# Altium PCB V1.PcbDoc
Units mil, origin at the board's own origin, x right, y up, seen from the top; angles counter-clockwise.
Board outline 1958.5 x 1958.5 mil, 2 copper layers (Top Layer, Bottom Layer); 18 components, 13 nets, 43 pads, 290 vias.
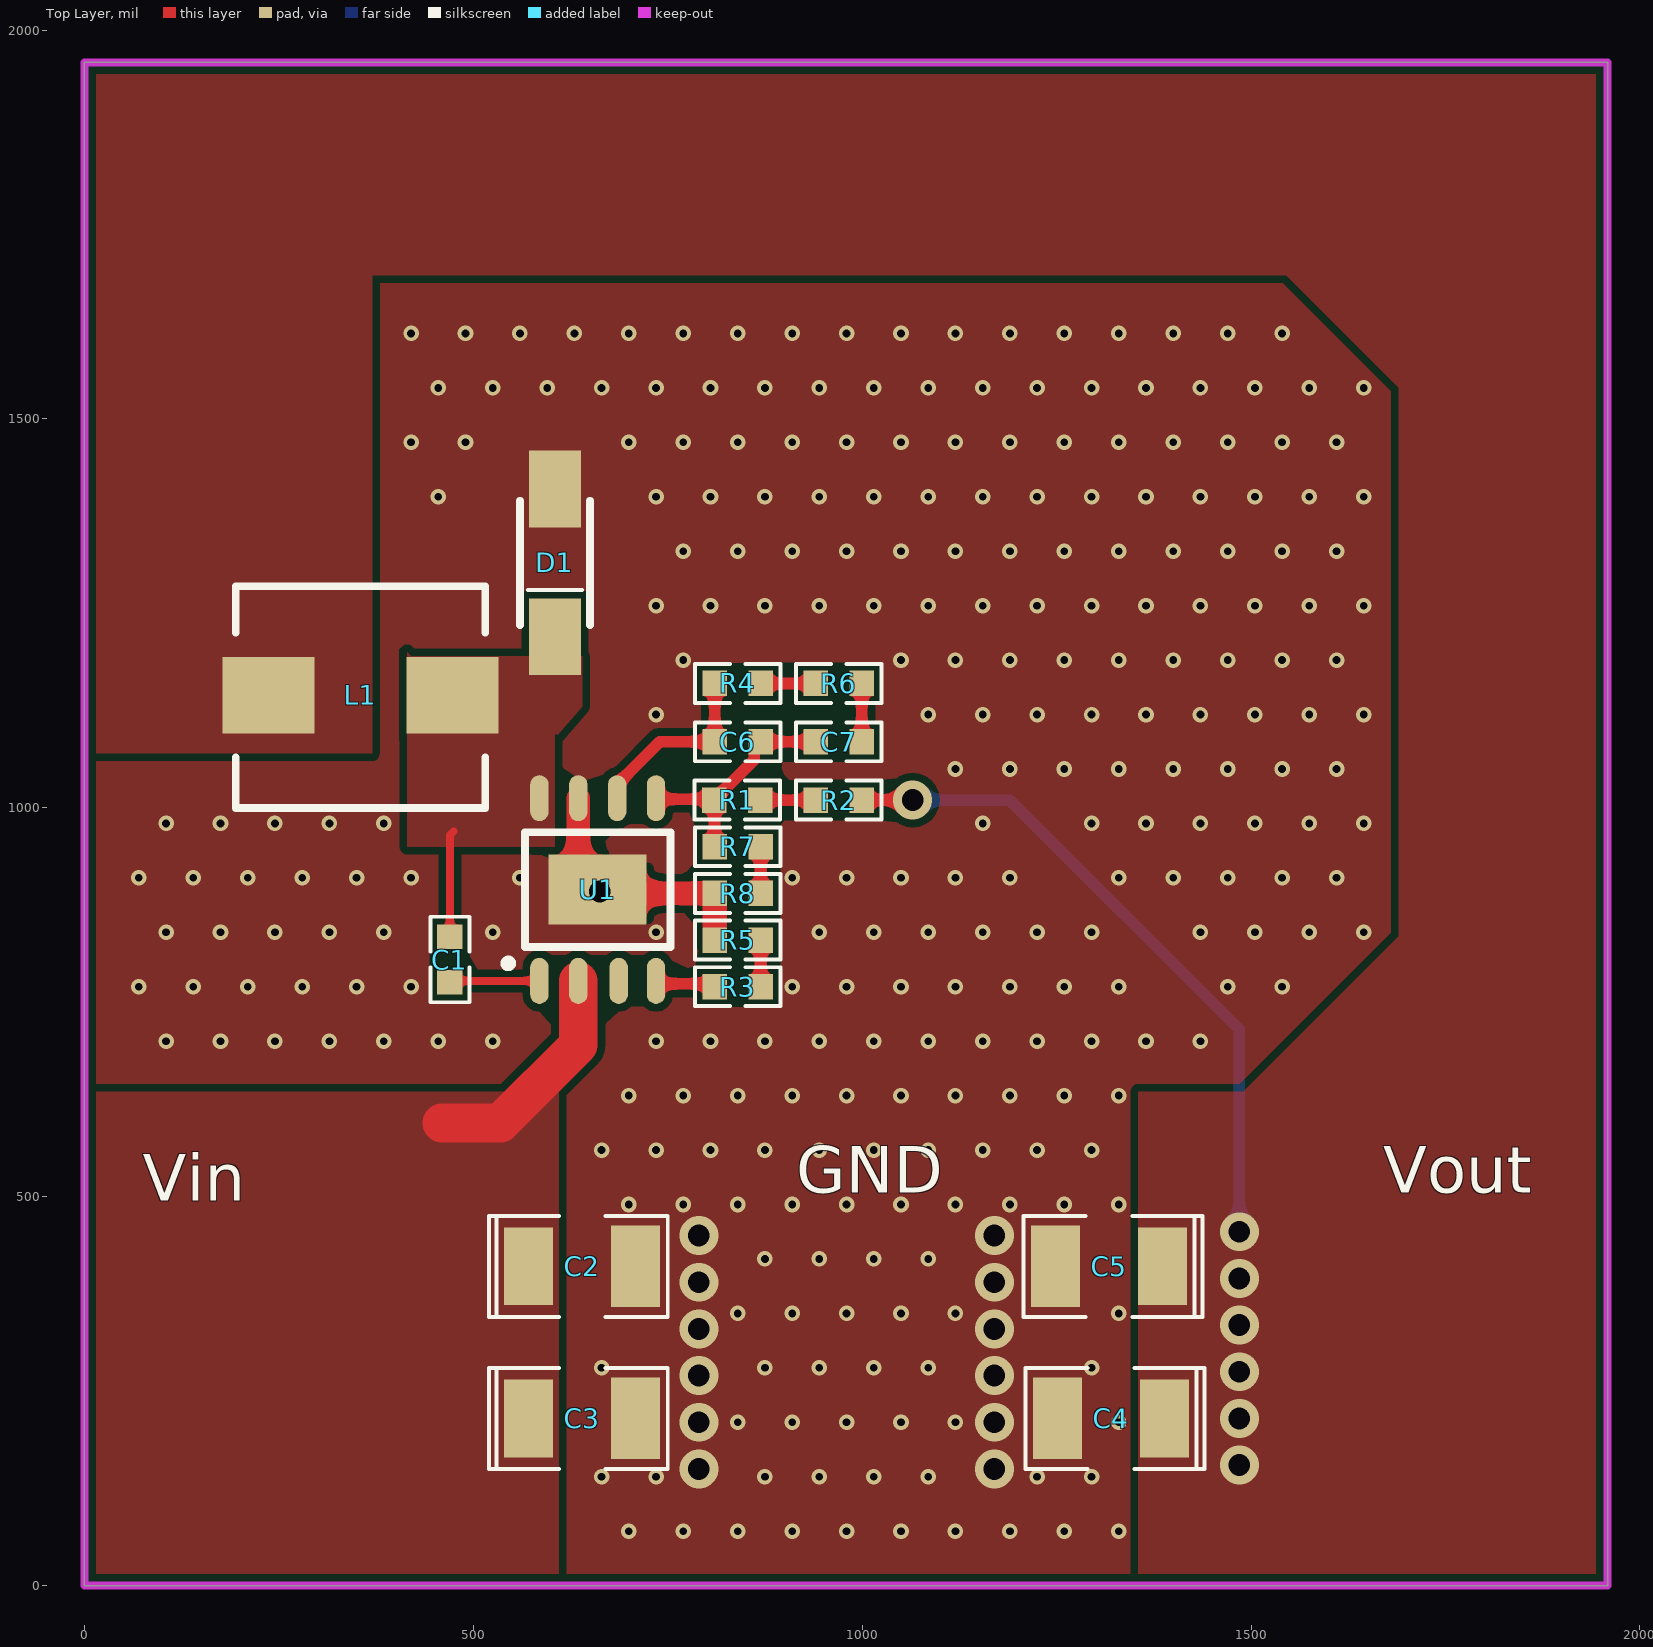
[diagram p0: Top Layer view]
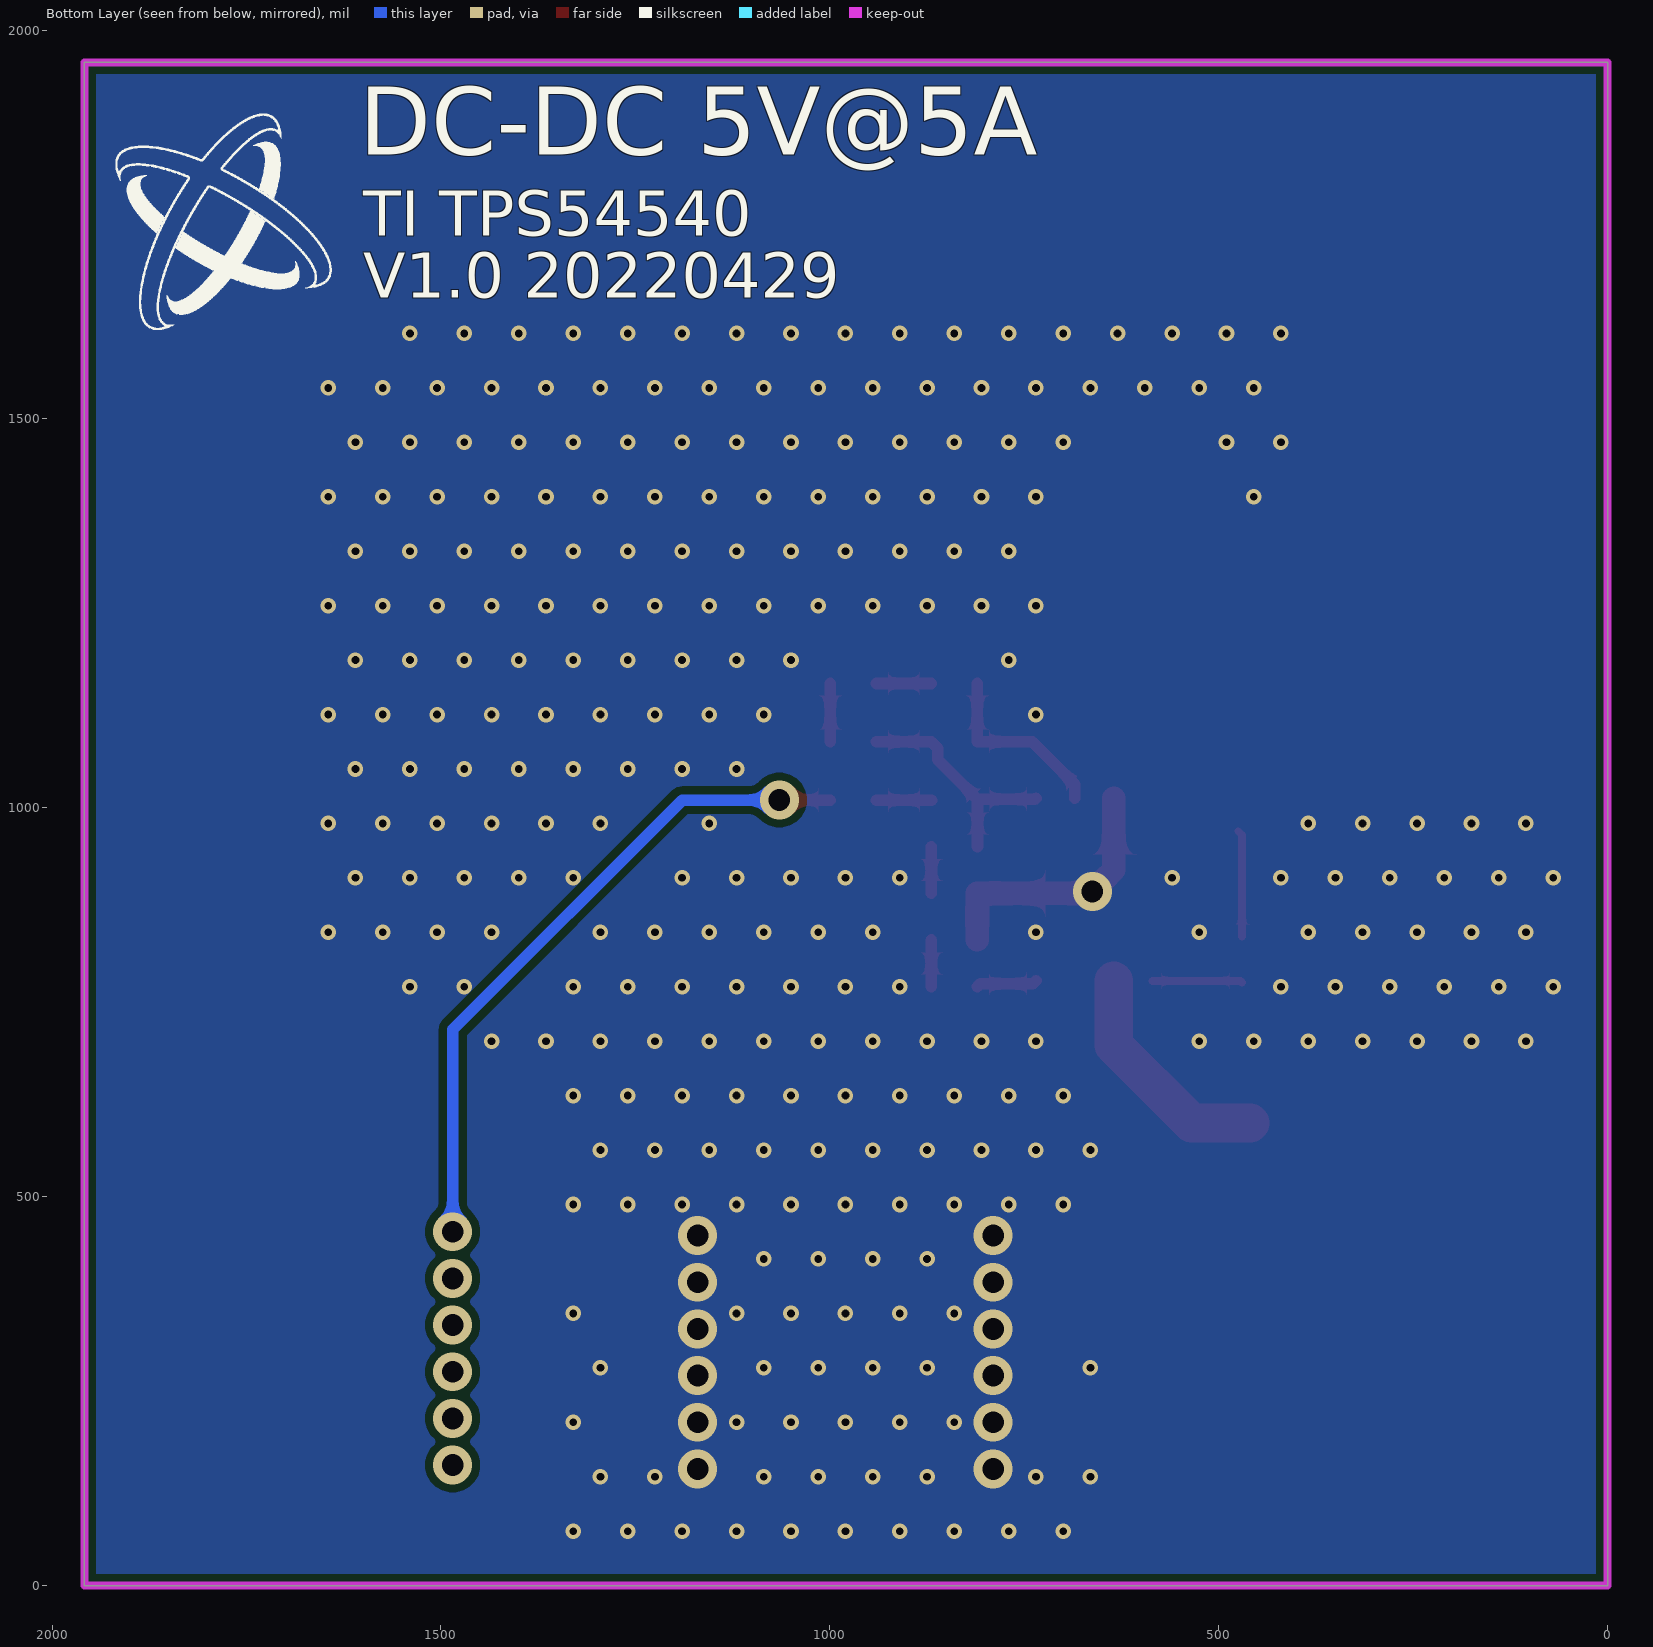
[diagram p1: Bottom Layer view, seen from below]
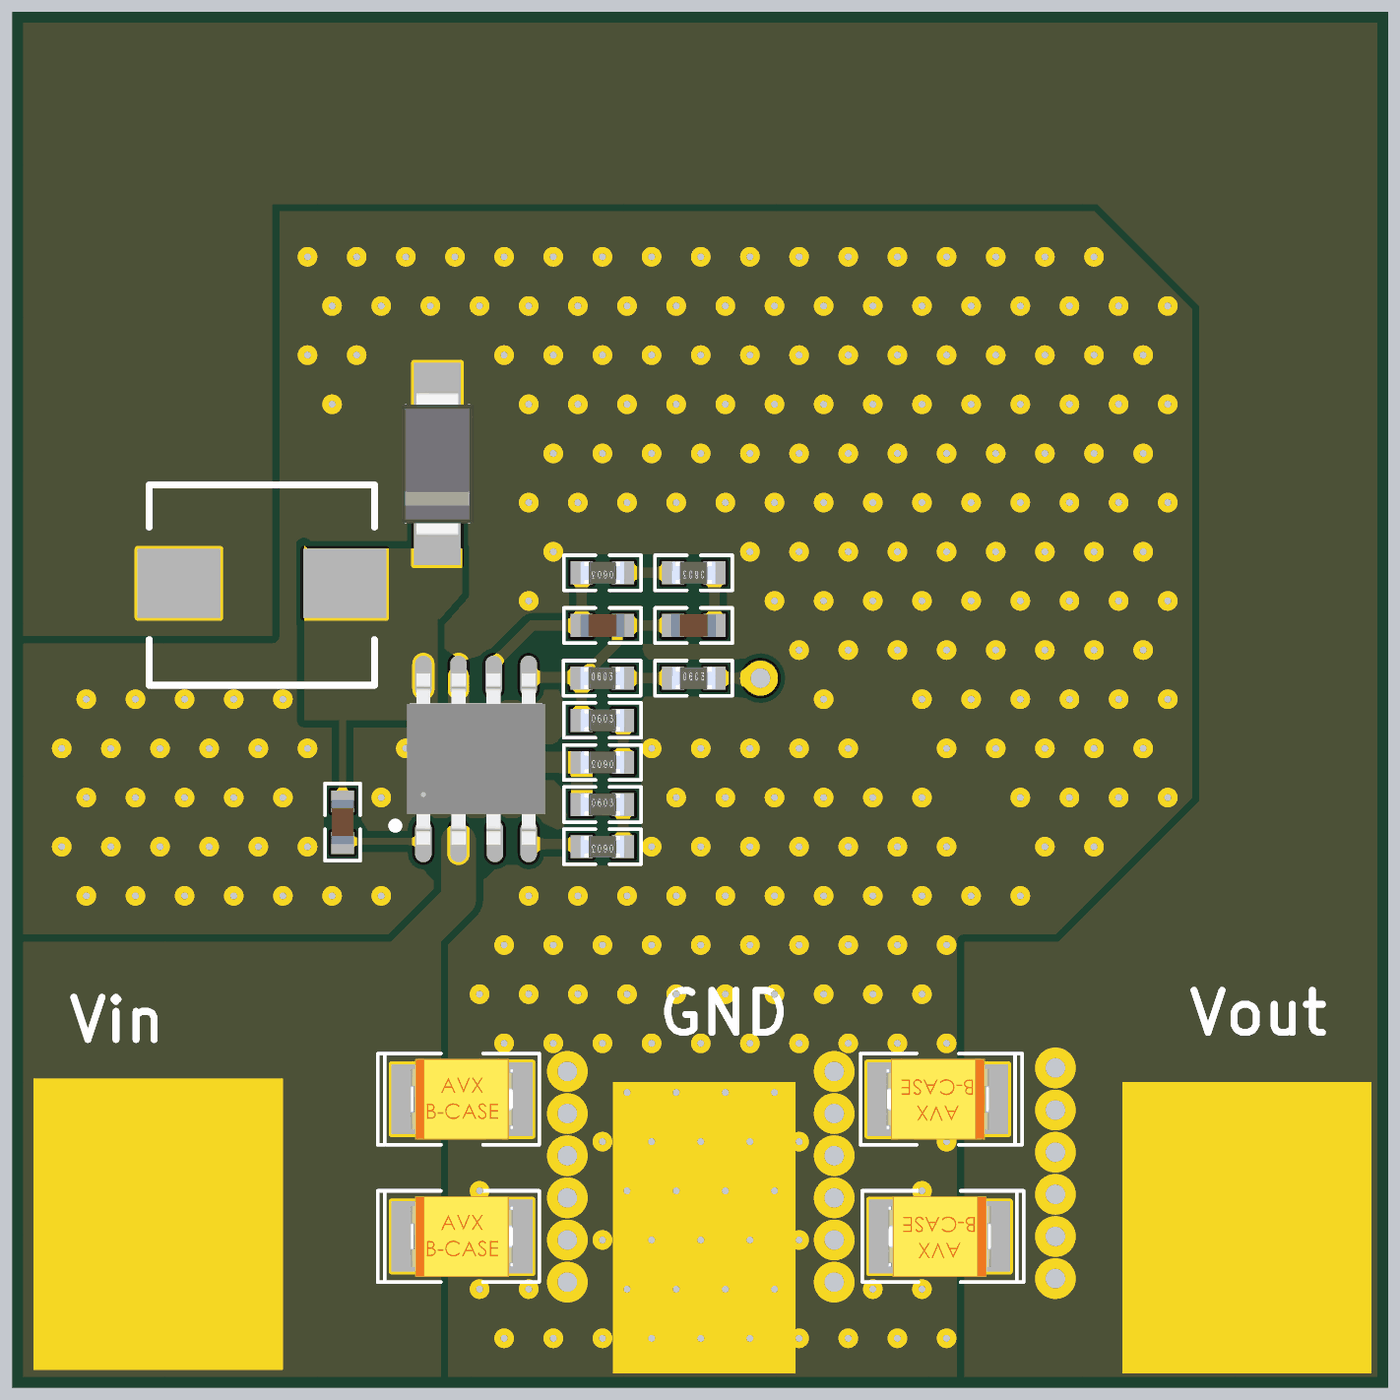
[diagram p2: 3D render of the assembled board from above, using the file's embedded part models]

## Layer stack, top to bottom
Top Solder: solder mask 0.4, Solder Resist, Dk 3.5
Top Layer: signal copper 1.4
Dielectric 1: dielectric 12.6, FR-4, Dk 4.8
Bottom Layer: signal copper 1.4
Bottom Solder: solder mask 0.4, Solder Resist, Dk 3.5

## Board outline
0,0 0,1958.5 1958.5,1958.5 1958.5,0

## Design rules (kind name [scope] priority, off if disabled: settings)
Clearance [All] p1: gap=10 ignorepadtopadclearanceinfootprint=FALSE except(0: Arc-Hole Track-Hole SMDPad-Hole THPad-Hole Via-Hole Fill-Hole Poly-Hole Region-Hole Text-Hole)
PolygonConnect [All] p1: connectstyle=Direct reliefconductorwidth=10 reliefentries=4 polygonreliefangle="90 Angle" airgapwidth=10
RoutingVias [All] p1: holewidth=10 width=20 viastyle="Through Hole" minholewidth=10 minwidth=20 maxholewidth=28 maxwidth=50
SolderMaskExpansion [All] p1: expansion=4 istentingtop=FALSE
Width [All] p1: maxlimit=50 minlimit=10 preferedwidth=10 minimp=50.000000 maximp=50.000000 favimp=50.000000
30 further rules are at their usual default settings.

## Components (designator, comment, footprint, x,y, rotation, side; value= is the part's Value field where it differs from the comment)
C1 "100nf" 0603C 470,805 r90 top
C2 "10uF" 3528B/1210 640,410.47 r0 top
C3 "10uF" 3528B/1210 640,215 r0 top
C4 "47u" 3528B/1210 1320,215 r180 top
C5 "47u" 3528B/1210 1317.5,410.47 r180 top
C6 "8p2" 0603C 840,1085 r0 top
C7 "1n8" 0603C 970,1085 r180 top
D1 "SS56" SMA 605,1315 r270 top
L1 "2u2" CD7X 355,1145 r180 top
R1 "60k" 0603R 839.53,1010 r0 top
R2 "0.4k" 0603R 970,1010 r0 top
R3 "76k" 0603R 840,770 r180 top
R4 "23k" 0603R 840,1160 r180 top
R5 "0.8k" 0603R 840,830 r0 top
R6 "0.7k" 0603R 970,1160 r180 top
R7 "11k" 0603R 840,950 r0 top
R8 "0.5k" 0603R 840,890 r180 top
U1 "TPS54540" SOP-8-PP 660,895 r90 top

## Footprints (in the part's own frame and the unit in brackets; to place one, negate y for a bottom-side part, rotate by r counter-clockwise, add the part's x,y. Pads: shape width x height; smd on the part's side, far side on the other; paste and mask are expansions set on the pad)
0603C [mm] "0603锟斤拷装锟斤拷锟斤拷锟斤拷锟斤拷"
  rect 0.8x0.83 smd: 1(-0.75,0) 2(0.75,0)
  silkscreen extent -1.4,-0.64 1.4,0.64, body extent -0.8,-0.41 0.8,0.41, height 0.81
0603R [mm] "0603锟斤拷装锟斤拷锟斤拷锟斤拷锟矫ｏ拷缺锟斤拷为锟斤拷锟斤拷锟斤拷锟斤拷/锟斤拷锟斤拷"
  rect 0.8x0.83 smd: 1(-0.75,0) 2(0.75,0)
  silkscreen extent -1.4,-0.64 1.4,0.64, body extent -0.8,-0.4 0.8,0.4, height 0.42
3528B/1210 [mm] "1210锟斤拷装锟斤拷锟斤拷锟斤拷锟紹锟斤拷锟矫ｏ拷缺锟斤拷为锟斤拷锟斤拷锟斤拷锟斤拷/锟斤拷锟斤拷"
  rect 1.6x2.54 smd: 1(-1.75,0)
  rect 1.6x2.667 smd: 2(1.75,0)
  silkscreen extent -3.05,-1.65 2.79,1.65, body extent -1.85,-1.47 1.85,1.46, height 2.03
CD7X [mm] "锟斤拷锟斤拷锟斤拷7mm*7mm锟斤拷械确锟阶皘ITEMGUID="
  rect 3x2.5 smd: 1(-3,0) 2(3,0)
  silkscreen extent -4.07,-3.56 4.07,3.68, body extent -4,-3.43 4,3.57, height 4
SMA [mm] "锟斤拷锟斤拷锟斤拷肖锟截伙拷锟斤拷锟斤拷锟杰的凤拷装锟斤拷锟斤拷锟斤拷锟竭碉拷一锟斤拷为锟斤拷锟斤拷"
  rect 2.5x1.7 smd: 1(-2.413,0) 2(2.413,0)
  silkscreen extent -2.03,-1.14 2.03,1.14, body extent -2.6,-1.3 2.6,1.3, height 2.37
SOP-8-PP [mm] "通锟斤拷SOP8锟斤拷装锟斤拷锟斤拷锟阶诧拷锟斤拷锟斤拷"
  oval 1.5x0.6 smd: 1(-2.984,1.905) 2(-2.984,0.635) 3(-2.984,-0.686) 4(-2.984,-1.905) 5(2.984,-1.905) 6(2.984,-0.635) 7(2.984,0.635) 8(2.984,1.905)
  rect 2.3x3.2 smd: 9(0,0)
  silkscreen extent -2.54,-2.37 1.87,3.05, body extent -3.1,-2.5 3.1,2.5, height 1.7

## Part data
C1 C6 C7: library part 电容_贴片
C2 C3 C4 C5: library part 电容_贴片钽
D1: library part 二极管_肖特基
L1: library part 电感_贴片
R1 R2 R3 R4 R5 R6 R7 R8: library part 电阻_贴片
U1: library part 芯片/IC-TPS54540

## Via types
v1: diameter 20, hole 10, Top Layer to Bottom Layer, 270 vias
v2: diameter 50, hole 28, Top Layer to Bottom Layer, 20 vias

## Nets (pads, with @x,y where several pads share a name; then routed paths per layer and width w, separated by ;. In a path a pad name is that pad's centre, name@x,y a point inside that pad or via, vN(x,y) a via of type N, cw(c..) or ccw(c..) an arc to the next point about the centre after c; other vN are vias at no path point)
GND: C2.2 C3.2 C4.2 C5.2 D1.1 R5.1 R8.2 U1.7 U1.9 | length 340.4
  Top Layer w30: U1.7 635,920 U1.9 665,890 R8.2 R5.1
  other v1: 700,70 770,70 840,70 910,70 980,70 1050,70 1120,70 1190,70 1260,70 1330,70 665,140 735,140 875,140 945,140 1015,140 1085,140 1225,140 1295,140 840,210 910,210 980,210 1050,210 1120,210 1330,210 665,280 875,280 945,280 1015,280 1085,280 1295,280 840,350 910,350 980,350 1050,350 1120,350 1330,350 875,420 945,420 1015,420 1085,420 700,490 770,490 840,490 910,490 980,490 1050,490 1120,490 1190,490 1260,490 1330,490 665,560 735,560 805,560 875,560 945,560 1015,560 1085,560 1155,560 1225,560 1295,560 700,630 770,630 840,630 910,630 980,630 1050,630 1120,630 1190,630 1260,630 1330,630 105,700 175,700 245,700 315,700 385,700 455,700 525,700 735,700 805,700 875,700 945,700 1015,700 1085,700 1155,700 1225,700 1295,700 1365,700 1435,700 70,770 140,770 210,770 280,770 350,770 420,770 910,770 980,770 1050,770 1120,770 1190,770 1260,770 1330,770 1470,770 1540,770 105,840 175,840 245,840 315,840 385,840 525,840 735,840 945,840 1015,840 1085,840 1155,840 1225,840 1295,840 1435,840 1505,840 1575,840 1645,840 70,910 140,910 210,910 280,910 350,910 420,910 560,910 910,910 980,910 1050,910 1120,910 1190,910 1330,910 1400,910 1470,910 1540,910 1610,910 105,980 175,980 245,980 315,980 385,980 1155,980 1295,980 1365,980 1435,980 1505,980 1575,980 1645,980 1120,1050 1190,1050 1260,1050 1330,1050 1400,1050 1470,1050 1540,1050 1610,1050 735,1120 1085,1120 1155,1120 1225,1120 1295,1120 1365,1120 1435,1120 1505,1120 1575,1120 1645,1120 770,1190 1050,1190 1120,1190 1190,1190 1260,1190 1330,1190 1400,1190 1470,1190 1540,1190 1610,1190 735,1260 805,1260 875,1260 945,1260 1015,1260 1085,1260 1155,1260 1225,1260 1295,1260 1365,1260 1435,1260 1505,1260 1575,1260 1645,1260 770,1330 840,1330 910,1330 980,1330 1050,1330 1120,1330 1190,1330 1260,1330 1330,1330 1400,1330 1470,1330 1540,1330 1610,1330 455,1400 735,1400 805,1400 875,1400 945,1400 1015,1400 1085,1400 1155,1400 1225,1400 1295,1400 1365,1400 1435,1400 1505,1400 1575,1400 1645,1400 420,1470 490,1470 700,1470 770,1470 840,1470 910,1470 980,1470 1050,1470 1120,1470 1190,1470 1260,1470 1330,1470 1400,1470 1470,1470 1540,1470 1610,1470 455,1540 525,1540 595,1540 665,1540 735,1540 805,1540 875,1540 945,1540 1015,1540 1085,1540 1155,1540 1225,1540 1295,1540 1365,1540 1435,1540 1505,1540 1575,1540 1645,1540 420,1610 490,1610 560,1610 630,1610 700,1610 770,1610 840,1610 910,1610 980,1610 1050,1610 1120,1610 1190,1610 1260,1610 1330,1610 1400,1610 1470,1610 1540,1610
  other v2: 790,150 1170,150 790,210 1170,210 790,270 1170,270 790,330 1170,330 790,390 1170,390 790,450 1170,450 662.5,892.5
NetC1_1: C1.1 U1.1 | length 115.8
  Top Layer w10: C1.1 472.03,777.5 U1.1
NetC1_2: C1.2 D1.2 L1.1 U1.8 | length 137.5
  Top Layer w10: C1.2 470,965 475,970
NetC6_1: C6.1 R4.2 U1.6 | length 240.9
  Top Layer w15: U1.6 685,1030.22 739.78,1085 C6.1 R4.2
NetC6_2: C6.2 C7.2 R1.1 R7.1 U1.5 | length 306.8
  Top Layer w15: U1.5 736.25,1011.25 808.75,1011.25 R1.1 ; R7.1 810.24,950.24 810.24,1009.76 R1.1 ; C7.2 C6.2 861.28,1076.75 861.28,1061.87 810,1010.59 R1.1
NetC7_1: C7.1 R6.1 | length 75
  Top Layer w15: C7.1 R6.1
NetR1_2: R1.2 R2.1 | length 71.4
  Top Layer w15: R1.2 R2.1
NetR3_1: R3.1 R5.2 | length 60
  Top Layer w15: R3.1 R5.2
NetR3_2: R3.2 U1.4 | length 78.6
  Top Layer w15: U1.4 738.75,773.75 806.72,773.75 R3.2
NetR4_1: R4.1 R6.2 | length 70.9
  Top Layer w15: R4.1 R6.2
NetR7_2: R7.2 R8.1 | length 60
  Top Layer w15: R8.1 R7.2
Vin: C2.1 C3.1 U1.2 | length 298.9
  Top Layer w50: 460,595 535,595 635,695 U1.2
Vout: C4.1 C5.1 L1.2 R2.2 | length 867.7
  Top Layer w15: R2.2 v2(1065,1010)
  Bottom Layer w15: v2(1065,1010) 1190,1010 1485,715 v2(1485,455)
  other v2: 1485,155 1485,215 1485,275 1485,335 1485,395
pads on no net: U1.3

## Polygon pours and split planes (outlines as drawn)
GND on Top Layer "GND_L01_P010" (solid, remove dead copper, pour order 10): 0,0 0,1955 1955,1955 1960,1960 1965,1955 1965,0
GND on Top Layer "GND_L01_P009" (solid, pour order 9): 650,1335 450,1335 450,1600 1490,1600 1490,840 1202.5,552.5 1160,595 990,595 1255,860 1255,1340
GND on Top Layer "GND_L01_P004" (solid, pour order 4): 677.5,-5 1287.5,-5 1287.5,635 677.5,635
NetC1_2 on Top Layer "NETC1_2_L01_P007" (solid, pour order 7): 575,1195 640,1195 640,1130 605,1090
Vout on Top Layer "VOUT_L01_P006" (solid, remove dead copper, pour order 6): 0,1070 370,1070 370,1685 1545,1685 1690,1540 1690,835 1485,630 1940,630 1960,650 1960,1960 5,1960 0,1955
NetC1_2 on Top Layer "NETC1_2_L01_P005" (solid, pour order 5): 415,1200 420,1195 605,1195 605,950 415,950
Vin on Top Layer "VIN_L01_P001" (solid, pour order 1): 0,-5 610,-5 610,635 0,635
Vout on Top Layer "VOUT_L01_P003" (solid, pour order 3): 1355,-5 1965,-5 1965,635 1355,635
GND on Bottom Layer "GND" (solid, pour order 11): 0,1960 1965,1960 1955,1950 1955,0 5,0 0,5

## Keep-outs
Keep-Out Layer:
  the board outline again, w10

## Silkscreen, mask and mechanical layers (free items; w line width, h text height)
Top Overlay:
  text "GND" at 915,505 h60
  text "Vout" at 1670,505 h60
  text "Vin" at 75,495 h60
Bottom Overlay:
  drawing of 4 lines, arcs and shapes, not listed
  text "DC-DC 5V@5A" at 1604.9,1811.04 h150
  text "TI TPS54540" at 1600,1716.32 h100
  text "V1.0 20220429" at 1599.93,1636.32 h100
Top Solder:
  rectangle: 30,25 385,440
  rectangle: 855,20 1115,435
  rectangle: 1580,20 1935,435
Bottom Solder:
  rectangle: 155,640 920,1475